# EAGLE board esp12rgbww (EAGLE 7.7.0)
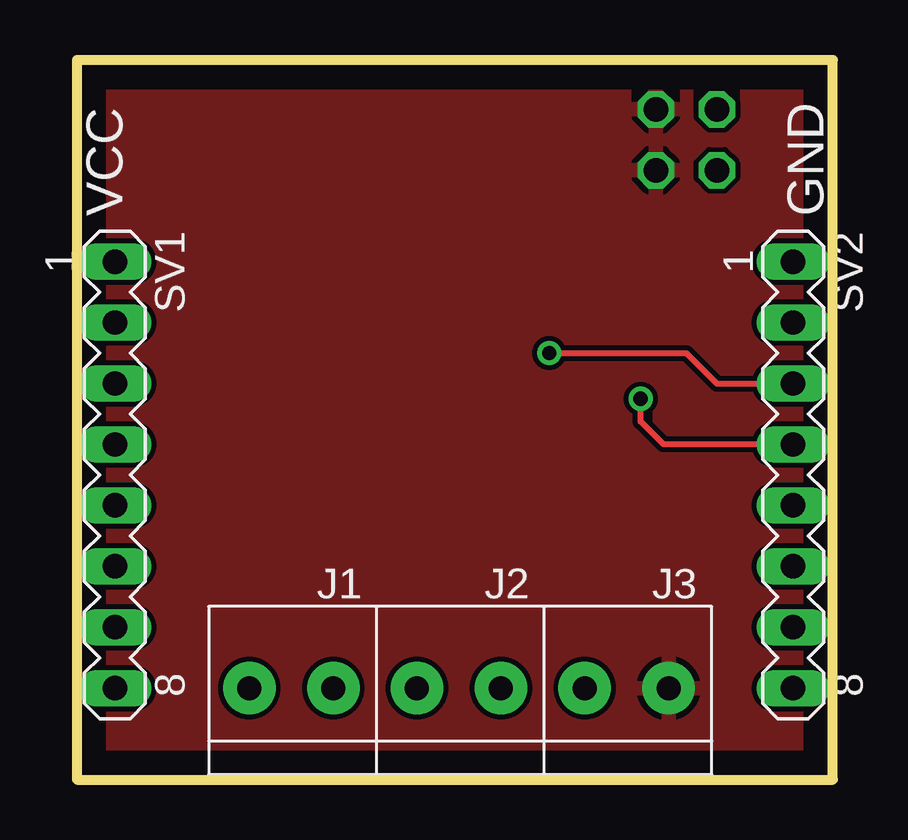
[diagram p0: board, top side]
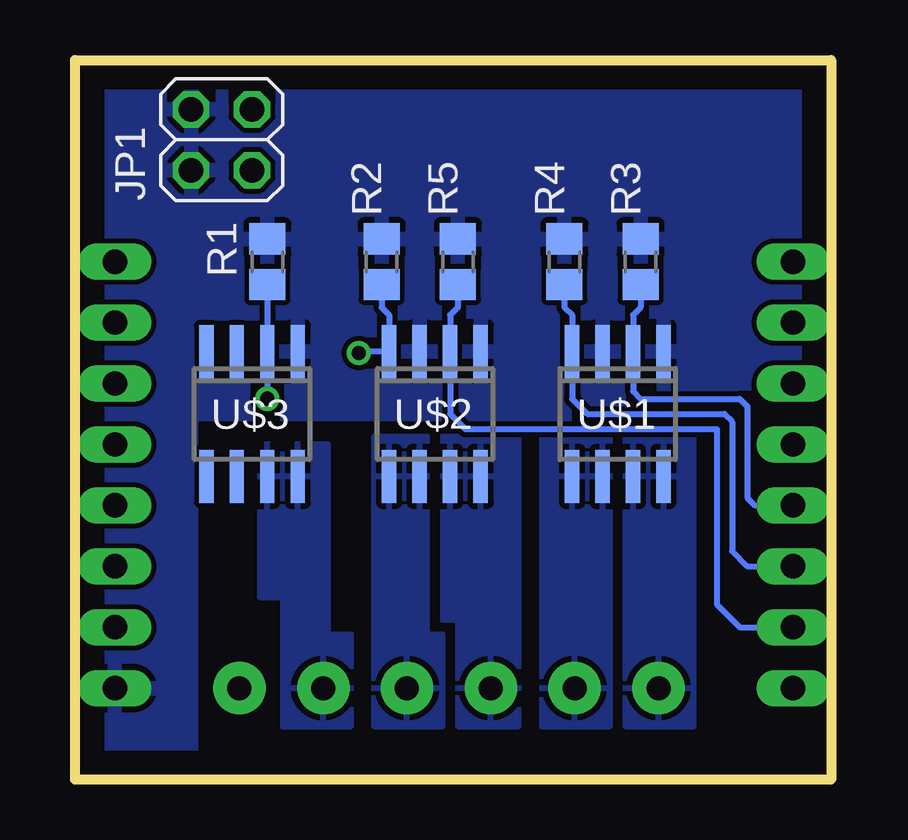
[diagram p1: board, bottom side, seen from below]

Size 31.5 x 30 mm. Coordinates in mm from the lower left corner, seen from the top.
Outline: 0,0 31.5,0 31.5,30 0,30 0,0
Copper layers (1*16): Top 0.035mm / dielectric 1.5mm / Bottom 0.035mm
Design rules "default": minimum track width 10mil, minimum drill 24mil, track to track 8mil, track to pad 8mil, pad to pad 8mil, via to via 8mil, smd to smd 8mil, copper to edge 40mil, drill to drill 8mil, minimum pad ring 10mil, minimum via ring 8mil, stop-mask expansion 4mil, vias tented up to drill 0mil, thermal gap 10mil
Net classes: 5 Signal: width 0.381 mm

## Footprints (pad centres in the part's own frame; a part is rotated, then mirrored left to right if it is on the bottom)
1X2-3.5MM = drill 1 pad 2.184: 1 1.8,0; 2 -1.7,0
2X02 = drill 1.016 octagon: 1 -1.27,-1.27; 2 -1.27,1.27; 3 1.27,-1.27; 4 1.27,1.27
R0805 = smd 1.3 x 1.5: 1 -0.95,0; 2 0.95,0
MA08-1 = drill 1.016 long: 1 -8.89,0; 2 -6.35,0; 3 -3.81,0; 4 -1.27,0; 5 1.27,0; 6 3.81,0; 7 6.35,0; 8 8.89,0
SO08 = smd 0.6 x 2.2: 1 -1.905,-2.6; 2 -0.635,-2.6; 3 0.635,-2.6; 4 1.905,-2.6; 5 1.905,2.6; 6 0.635,2.6; 7 -0.635,2.6; 8 -1.905,2.6

## Placement (x,y rotation side)
J1  1X2-3.5MM  [1X2-3.5MM]  8.89,3.81 0 top
J2  1X2-3.5MM  [1X2-3.5MM]  15.88,3.81 0 top
J3  1X2-3.5MM  [1X2-3.5MM]  22.86,3.81 0 top
JP1  [2X02]  25.4,26.67 90 bottom
R1  10k  [R0805]  23.5,21.59 270 bottom
R2  10k  [R0805]  18.73,21.59 90 bottom
R3  10k  [R0805]  7.94,21.59 90 bottom
R4  10k  [R0805]  11.11,21.59 90 bottom
R5  10k  [R0805]  15.56,21.59 90 bottom
SV1  [MA08-1]  1.59,12.7 270 top
SV2  [MA08-1]  29.84,12.7 270 top
U$1  AOD4806  [SO08]  8.89,15.24 180 bottom
U$2  AOD4806  [SO08]  16.51,15.24 180 bottom
U$3  AOD4806  [SO08]  24.13,15.24 180 bottom

## Library data of the parts
J1-J3 = adafruit
JP1 = pinhead
R1-R5 = rcl
SV1 SV2 = con-lstb; OC_FARNELL: unknown; OC_NEWARK: unknown
U$1-U$3 = esp12_RGBWW

## Nets
+12V: J3.1 JP1.1 JP1.3
ADC: SV1.2
B: J1.2 U$1.7 U$1.8
CH_PD: SV1.3
CW: J2.1 U$2.5 U$2.6
G: J1.1 U$1.5 U$1.6
GND: JP1.2 JP1.4 R1.1 R2.2 R3.2 R4.2 R5.2 SV2.8 U$1.1 U$1.3 U$2.1 U$2.3 U$3.1
GPIO0: SV2.5
GPIO2: SV2.6
GPIO4: R1.2 SV2.4 U$3.2
GPIO5: R2.1 SV2.3 U$2.4
GPIO12: R4.1 SV1.6 U$1.4
GPIO13: R5.1 SV1.7 U$2.2
GPIO14: R3.1 SV1.5 U$1.2
GPIO15: SV2.7
GPIO16: SV1.4
R: J2.2 U$2.7 U$2.8
REST: SV1.1
RXD: SV2.2
TXD: SV2.1
VCC: SV1.8
WW: J3.2 U$3.7 U$3.8

## Tracks (layer width: path | path; a pad name or v marks a point on that pad's centre or on a via)
+12V
  pour Top: 0,30.48 31.75,30.48 31.75,0 0,0
B
  pour Bottom: 8.57,14.29 8.57,2.22 5.71,2.22 5.71,14.29
CW
  pour Bottom: 19.05,14.29 19.05,2.22 16.19,2.22 16.19,6.03 16.83,6.03 16.83,14.29
G
  pour Bottom: 12.06,14.29 12.06,2.22 9.21,2.22 9.21,14.29
GND
  pour Bottom: 0,30.48 31.75,30.48 31.75,1.27 26.67,1.27 26.67,15.24 0,15.24
GPIO4  (via drill 0.6)
  Top 0.254: SV2.4 24.45,13.97 23.5,14.92 v23.5,15.88
  Bottom 0.254: v23.5,15.88 U$3.2 R1.2
GPIO5  (via drill 0.6)
  Top 0.254: v19.68,17.78 25.4,17.78 26.67,16.51 SV2.3
  Bottom 0.254: v19.68,17.78 19.62,17.84 U$2.4 18.41,19.37 18.73,19.68 R2.1
GPIO12
  Bottom 0.254: SV1.6 3.49,8.89 4.13,9.53 4.13,14.92 4.45,15.24 10.16,15.24 10.79,15.88 U$1.4 10.79,19.37 11.11,19.68 R4.1
GPIO13
  Bottom 0.254: SV1.7 3.81,6.35 4.76,7.3 4.76,14.61 15.24,14.61 15.88,15.24 U$2.2 15.88,19.37 15.56,19.68 R5.1
GPIO14
  Bottom 0.254: SV1.5 3.17,11.43 3.49,11.75 3.49,15.56 3.81,15.88 7.94,15.88 8.26,16.19 U$1.2 8.26,19.37 7.94,19.68 R3.1
R
  pour Bottom: 16.19,14.29 16.19,6.67 15.56,6.67 15.56,2.22 13.02,2.22 13.02,14.29
WW
  pour Bottom: 23.81,13.97 23.81,7.62 22.86,7.62 22.86,2.22 20,2.22 20,6.03 20.95,6.03 20.95,13.97

## Text on the board
tNames: VCC | GND